# Altium PCB 3043-1-1532.PcbDoc (part 2 of 2)
Units mm, origin at the board's own origin, x right, y up, seen from the top; angles counter-clockwise.
Board outline 82.5 x 82.18 mm, 4 copper layers (Top Layer, Mid-Layer 1, Mid-Layer 2, Bottom Layer); 175 components, 111 nets, 527 pads, 268 vias.
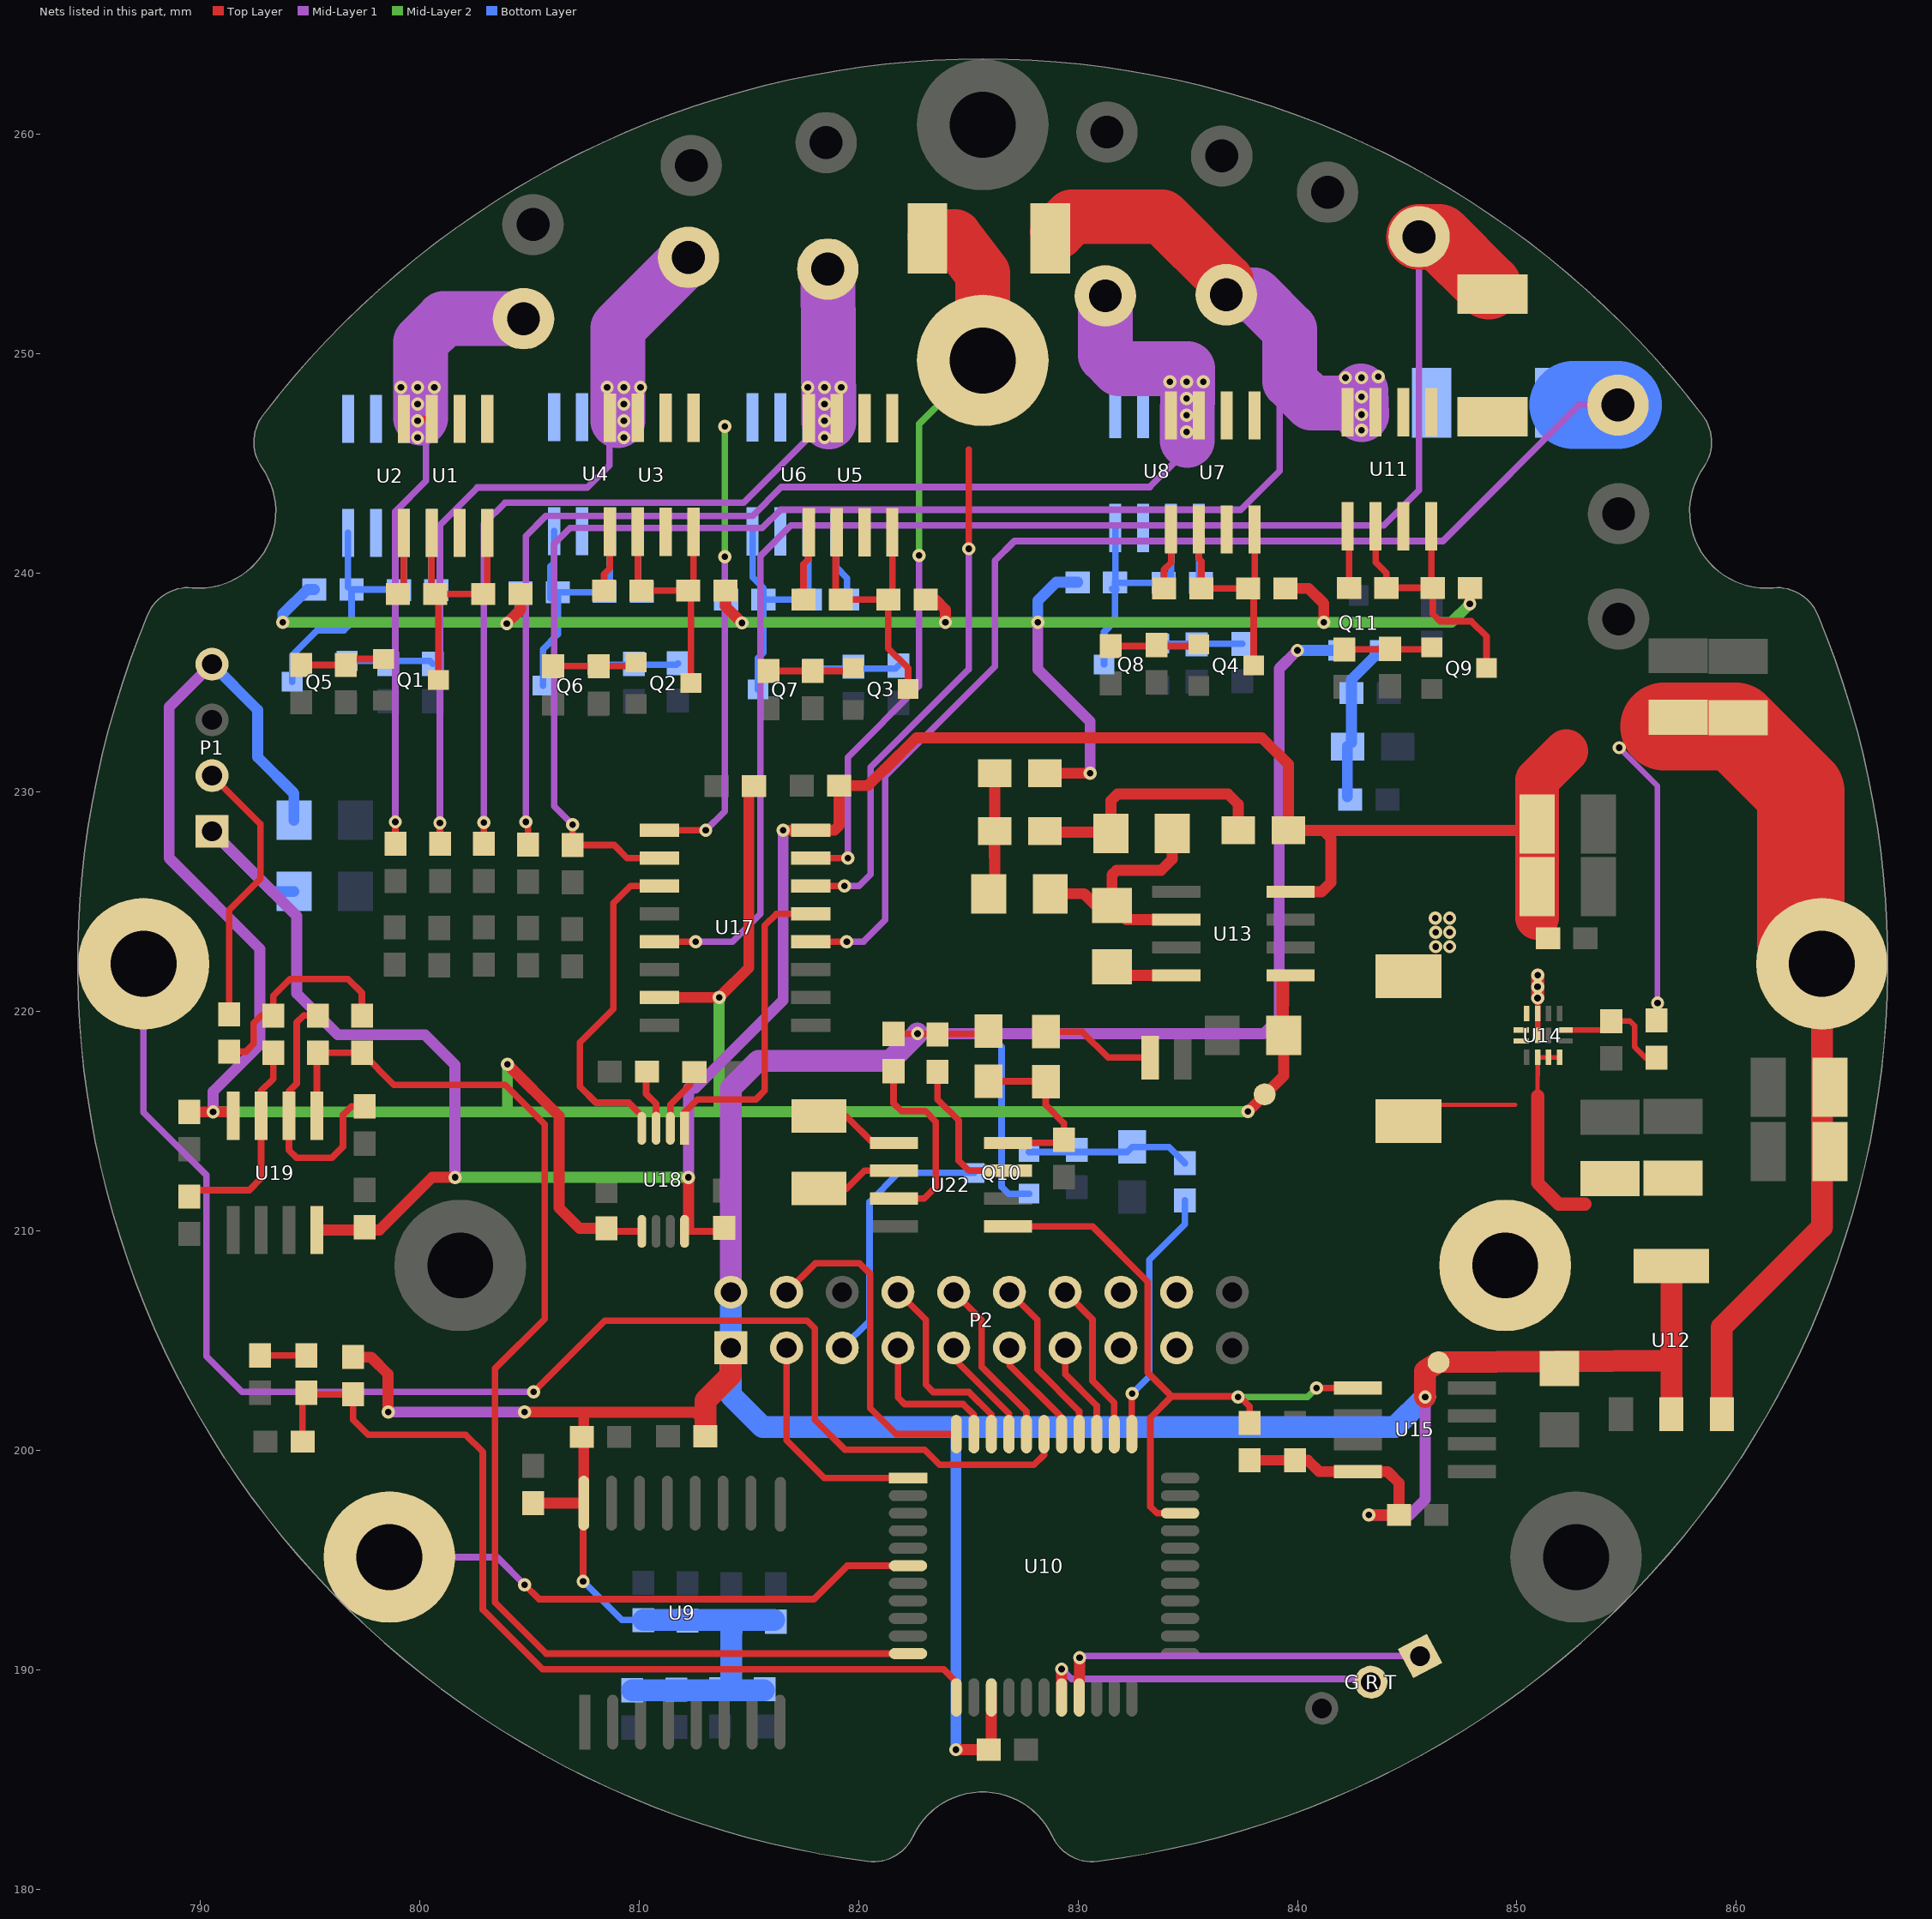
[diagram p4: the nets of this part, all layers, seen from the top]

## Via types
v1: diameter 0.6, hole 0.3, Top Layer to Bottom Layer, 268 vias

## Nets (pads, with @x,y where several pads share a name; then routed paths per layer and width w, separated by ;. In a path a pad name is that pad's centre, name@x,y a point inside that pad or via, vN(x,y) a via of type N, cw(c..) or ccw(c..) an arc to the next point about the centre after c; other vN are vias at no path point) (continued)
IIC0_SDA: R67.1 U10.31 U15.5 U22.5 | length 30.1
  Top Layer w0.3: U22.5@826.805,210.21 830.656,210.21 833.171,207.696 833.171,203.556 834.263,202.463 ; U10.31@834.649,197.139 833.593,197.139 833.298,197.434 833.298,201.498 834.263,202.463 ; R67.1@837.819,201.256 837.819,202.006 837.362,202.463 834.263,202.463 ; v1(840.867,202.844) U15.5@842.753,202.844
  Mid-Layer 2 w0.3: v1(837.286,202.438) 840.461,202.438 v1(840.867,202.844)
LED_CTRL: P2.5 Q10.3 | length 12.5
  Bottom Layer w0.3: P2.5@819.252,204.673 820.496,205.918 820.496,211.328 821.817,212.649 Q10.3@825.266,212.649
LED_PWR_EN: R47.1 U10.34 | length 11.6
  Top Layer w0.3: U10.34@832.449,200.739 v1@832.449,202.58
  Bottom Layer w0.3: v1(832.46,202.59) 833.247,203.378 833.247,208.686 834.873,210.312 R47.1@834.873,211.392
LIMA_SEN: C15.2 R46.2 U10.11 U19.1 | length 57.6
  Top Layer w0.3: U19.1@795.299,215.249 R46.2@795.299,218.073 ; R46.2@795.35,218.123 C15.2@797.357,218.123 798.818,216.662 803.885,216.662 805.688,214.859 805.688,205.994 803.427,203.733 803.427,193.065 805.754,190.739 U10.11@822.833,190.739
MCU_RXD: "G R T.2" U10.18 | length 15.6
  Top Layer w0.5: U10.18@829.249,188.739 v1(829.249,190.032)
  Mid-Layer 1 w0.3: v1(829.249,190.032) 829.696,189.586 843.198,189.586 843.349,189.435
MCU_RXD2_2: RxD.1 U10.39 | length 65.6
  Top Layer w0.3: v1(805.18,202.667) 808.431,205.918 817.651,205.918 818.007,205.562 818.007,201.397 819.379,200.025 823.011,200.025 823.697,199.339 827.989,199.339 828.449,199.799 U10.39@828.449,200.739
  Mid-Layer 1 w0.3: RxD.1@787.403,222.181 787.403,215.414 790.27,212.547 790.27,204.292 791.896,202.667 v1(805.18,202.667)
MCU_TXD: "G R T.1" U10.19 | length 17.4
  Top Layer w0.5: U10.19@830.049,188.739 v1(830.072,190.551)
  Mid-Layer 1 w0.3: v1(830.072,190.551) 830.148,190.627 845.591,190.627
MCU_TXD2_2: TxD.1 U10.6 | length 25.7
  Top Layer w0.3: v1(804.774,193.878) 805.434,193.218 817.956,193.218 819.48,194.742 820.064,194.742 U10.6@822.249,194.739 U10.6@822.833,194.739
  Mid-Layer 1 w0.3: TxD.1@798.606,195.135 803.517,195.135 v1(804.774,193.878)
NetBT2_1: BT2.1 D4.1 | length 5.3
  Top Layer w0.3: D4.1@828.528,219.089 830.185,219.089 831.367,217.907 BT2.1@833.29,217.907
NetC3_1: C3.1 U13.4 | length 3.1
  Top Layer w0.5: C3.1@831.545,222.047 831.748,222.047 832.145,221.65 U13.4@834.482,221.65
NetC3_2: C3.2 C23.2 C24.2 U13.2 | length 11.8
  Top Layer w0.5: C24.2@828.732,225.374 830.275,225.374 830.803,224.847 C3.2@831.545,224.847 ; C23.2@834.294,228.117 834.294,226.955 833.78,226.441 831.748,226.441 831.545,226.238 C3.2@831.545,224.847 ; U13.2@834.482,224.19 832.202,224.19 C3.2@831.545,224.847
NetC15_1: C15.1 R43.2 R44.1 | length 9.8
  Top Layer w0.3: R43.2@791.312,218.174 792.062,218.174 792.418,218.531 792.418,219.47 792.771,219.823 R44.1@793.318,219.823 793.318,220.726 794.08,221.488 796.722,221.488 797.357,220.853 C15.1@797.357,219.823
NetC16_1: C16.1 R44.2 U19.3 | length 9.6
  Top Layer w0.3: C16.1@789.483,211.568 789.776,211.861 792.226,211.861 792.759,212.395 792.759,216.383 793.318,216.941 R44.2@793.318,218.123
NetC23_1: C23.1 D1.2 D2.1 | length 11.8
  Top Layer w0.5: D2.1@828.553,228.182 831.43,228.182 C23.1@831.494,228.117 831.494,229.616 831.799,229.921 836.828,229.921 837.3,229.45 D1.2@837.3,228.265
NetC27_1: C27.1 D3.2 D4.2 U22.8 | length 8.3
  Top Layer w0.3: D3.2@825.912,216.828 D4.2@828.502,216.828 ; U22.8@826.805,214.02 C27.1@829.296,214.02 ; D4.2@828.528,216.803 828.528,215.742 829.361,214.909 C27.1@829.361,213.956
NetD5_2: D5.2 Q10.1 R47.2 R50.2 | length 7.5
  Bottom Layer w0.3: Q10.1@827.766,213.599 832.235,213.599 D5.2@832.465,213.829 834.136,213.829 R47.2@834.873,213.092
NetD6_2: D6.2 Q11.1 R51.1 R52.2 | length 7
  Bottom Layer w0.5: R51.1@842.278,229.793 D6.2@842.278,232.085 ; D6.2@842.455,232.262 842.455,235.141 843.747,236.433 Q11.1@843.747,236.469
NetP1_2: P1.2 R43.1 | length 12.4
  Top Layer w0.3: P1.2@790.524,230.759 792.734,228.549 792.734,226.06 791.312,224.638 R43.1@791.312,219.874
NetQ1_1: Q1.1 R70.1 R78.1 | length 3.9
  Top Layer w0.3: R70.1@794.588,235.8 R78.1@796.62,235.8 796.898,236.078 Q1.1@798.342,236.078
NetQ2_1: Q2.1 R71.1 R87.1 | length 3.6
  Top Layer w0.3: R71.1@806.069,235.749 Q2.1@809.672,235.749
NetQ3_1: Q3.1 R72.1 R88.1 | length 3.7
  Top Layer w0.3: R72.1@815.899,235.532 Q3.1@819.629,235.532
NetQ4_1: Q4.1 R73.1 R89.1 | length 3.9
  Top Layer w0.3: R73.1@831.494,236.664 Q4.1@835.428,236.664
NetQ5_1: Q5.1 R74.1 R90.1 | length 4
  Bottom Layer w0.3: Q5.1@796.676,235.989 800.444,235.989 R74.1@800.583,235.851
NetQ6_1: Q6.1 R75.1 R91.1 | length 3.7
  Bottom Layer w0.3: Q6.1@808.106,235.811 811.694,235.811 R75.1@811.759,235.876
NetQ7_1: Q7.1 R76.1 R92.1 | length 4
  Bottom Layer w0.3: Q7.1@817.911,235.633 821.676,235.633 R76.1@821.817,235.775
NetQ8_1: Q8.1 R77.1 R93.1 | length 3.8
  Bottom Layer w0.3: Q8.1@833.684,236.776 837.478,236.776 R77.1@837.489,236.765
NetQ9_1: Q9.1 R27.1 R32.1 | length 3.9
  Top Layer w0.3: R27.1@842.137,236.511 Q9.1@846.019,236.511
NetR1_1: R1.1 U1.1 U1.3 | length 2.9
  Top Layer w0.3: R1.1@798.996,239.039 799.262,239.305 U1.1@799.262,241.824
NetR2_2: R2.2 U2.1 U2.3 | length 2.6
  Bottom Layer w0.3: R2.2@800.532,239.268 U2.1@800.532,241.824
NetR6_2: R6.2 U11.1 U11.3 | length 2.7
  Top Layer w0.3: R6.2@842.354,239.319 U11.1@842.354,242.065
NetR7_2: R7.2 U3.1 U3.3 | length 2.8
  Top Layer w0.3: R7.2@808.394,239.192 808.394,239.942 808.66,240.208 U3.1@808.66,241.875
NetR10_2: R10.2 U4.1 U4.3 | length 2.8
  Bottom Layer w0.3: U4.1@809.93,241.9 809.93,239.331 R10.2@810.119,239.141
NetR11_2: R11.2 U5.1 U5.3 | length 3.2
  Top Layer w0.3: R11.2@817.487,238.785 817.487,240.399 817.728,240.64 U5.1@817.728,241.85
NetR12_2: R12.2 U6.1 U6.3 | length 3.3
  Bottom Layer w0.3: U6.1@818.972,241.891 818.972,240.259 819.467,239.764 R12.2@819.467,238.785
NetR13_2: R13.2 U7.1 U7.3 | length 2.8
  Top Layer w0.3: R13.2@833.921,239.293 833.921,240.145 834.238,240.462 U7.1@834.238,241.977
NetR14_2: R14.2 R15.1 U14.12 | length 5.6
  Top Layer w0.25: U14.12@852.195,219.163 853.897,219.163 R15.1@854.304,219.569 855.155,219.569 855.37,219.354 855.37,218.389 855.865,217.895 R14.2@856.361,217.895
NetR16_2: R16.2 U8.1 U8.3 | length 2.8
  Bottom Layer w0.3: R16.2@835.508,239.282 U8.1@835.508,242.043
NetR37_1: R37.1 R39.1 | length 2.1
  Top Layer w0.3: R39.1@792.709,204.329 R37.1@794.817,204.329
NetR41_1: R41.1 U18.2 | length 3.1
  Top Layer w0.3: U18.2@811.413,214.681 811.413,215.758 812.317,216.662 R41.1@812.317,217.361
NetR42_2: R42.2 U18.3 | length 2.8
  Top Layer w0.3: R42.2@810.311,217.336 810.311,216.256 810.763,215.803 U18.3@810.763,214.681
NetR45_2: R45.2 R46.1 U19.2 | length 12.5
  Top Layer w0.3: R46.1@795.35,219.823 794.702,219.823 794.385,219.507 794.385,216.713 794.029,216.357 794.029,213.69 794.385,213.335 795.985,213.335 796.493,213.843 796.493,215.29 796.886,215.683 R45.2@797.484,215.671
NetR48_2: R48.2 U22.7 | length 6.9
  Top Layer w0.3: R48.2@823.595,217.26 823.595,216.002 824.56,215.036 824.56,213.208 825.017,212.75 U22.7@826.805,212.75
NetR49_2: R49.2 U22.3 | length 8.8
  Top Layer w0.3: R49.2@821.588,217.285 821.588,215.824 821.944,215.468 823.036,215.468 823.519,214.986 823.519,212.014 822.985,211.48 U22.3@821.605,211.48
NetU17_3: U17.3 U18.4 | length 15.4
  Top Layer w0.3: U18.4@810.113,214.681 810.113,215.259 809.523,215.849 808.025,215.849 807.288,216.586 807.288,218.592 808.812,220.116 808.812,224.942 809.6,225.73 U17.3@810.925,225.73
NetU17_13: U17.13 U18.1 | length 14.6
  Top Layer w0.3: U18.1@812.063,214.681 812.063,215.417 812.648,216.002 815.315,216.002 815.721,216.408 815.721,223.926 816.254,224.46 U17.13@817.825,224.46
NetU22_1: U22.1 Y1.2 | length 3.9
  Top Layer w0.3: Y1.2@818.185,215.24 819.429,215.24 820.649,214.02 U22.1@821.605,214.02
NetU22_2: U22.2 Y1.1 | length 3.8
  Top Layer w0.3: Y1.1@818.185,211.938 819.455,211.938 820.268,212.75 U22.2@821.605,212.75
RHYTHM_CS0: P2.7 U10.43 | length 6.9
  Top Layer w0.3: P2.7@821.792,204.673 821.792,202.413 822.096,202.108 824.763,202.108 825.249,201.622 U10.43@825.249,200.739
RHYTHM_CS1: P2.8 U10.42 | length 9.2
  Top Layer w0.3: P2.8@821.792,207.213 823.062,205.943 823.062,202.997 823.401,202.658 825.026,202.658 826.049,201.635 U10.42@826.049,200.739
RHYTHM_CS2: P2.9 U10.41 | length 5
  Top Layer w0.3: P2.9@824.332,204.673 824.332,204.191 826.849,201.673 U10.41@826.849,200.739
RHYTHM_CS3: P2.10 U10.40 | length 7.8
  Top Layer w0.3: P2.10@824.332,207.213 825.602,205.943 825.602,203.81 827.649,201.762 U10.40@827.649,200.739
RHYTHM_CS4: P2.11 U10.38 | length 4.9
  Top Layer w0.3: P2.11@826.872,204.673 826.872,203.886 829.249,201.509 U10.38@829.249,200.739
RHYTHM_CS5: P2.12 U10.37 | length 7.8
  Top Layer w0.3: P2.12@826.872,207.213 828.142,205.943 828.142,203.698 830.049,201.791 U10.37@830.049,200.739
RHYTHM_CS6: P2.13 U10.36 | length 4.5
  Top Layer w0.3: P2.13@829.412,204.673 829.412,203.479 830.849,202.042 U10.36@830.849,200.739
RHYTHM_CS7: P2.14 U10.35 | length 7.4
  Top Layer w0.3: P2.14@829.412,207.213 830.656,205.969 830.656,203.175 831.649,202.182 U10.35@831.649,200.739
S1_1: Q1.3 R1.2 R17.1 U1.2 U1.4 | length 11.9
  Top Layer w0.3: U1.2@800.532,241.824 800.532,239.407 800.848,239.09 Q1.3@800.848,235.134 ; R1.2@800.696,239.039 R17.1@802.882,239.039 803.072,239.229 U1.4@803.072,241.824
S1_2: Q2.3 R7.1 R18.1 U3.2 U3.4 | length 11.8
  Top Layer w0.3: U3.2@809.93,241.875 809.93,239.356 R7.1@810.094,239.192 R18.1@812.229,239.192 812.47,239.432 U3.4@812.47,241.875 ; Q2.3@812.348,234.975 R18.1@812.348,239.073
S1_3: Q3.3 R11.1 R19.1 U5.2 U5.4 | length 13.2
  Top Layer w0.3: U5.2@818.947,242.113 818.947,239.026 R11.1@819.187,238.785 R19.1@821.348,238.785 ; U5.4@821.538,241.85 821.538,238.975 R19.1@821.348,238.785 ; Q3.3@822.254,234.708 822.254,235.656 821.348,236.562 R19.1@821.348,238.785
S1_4: Q4.3 R13.1 R20.1 U7.2 U7.4 | length 11.4
  Top Layer w0.3: U7.2@835.508,242.027 835.508,240.64 835.621,240.526 R13.1@835.621,239.293 R20.1@837.833,239.293 ; Q4.3@838.002,235.788 838.002,239.124 R20.1@837.833,239.293 ; U7.4@838.048,242.027 838.048,239.508 R20.1@837.833,239.293
S1_5: Q9.3 R6.1 R26.1 U11.2 U11.4 | length 13.4
  Top Layer w0.3: U11.2@843.559,242.129 843.559,240.487 844.054,239.993 R6.1@844.054,239.319 R26.1@846.164,239.319 846.164,238.137 846.506,237.795 847.928,237.795 848.619,237.104 Q9.3@848.619,235.661 ; R26.1@846.099,239.383 U11.4@846.099,242.129
S2_1: Q5.3 R2.1 R21.1 U2.2 U2.4 | length 13.3
  Bottom Layer w0.3: Q5.3@794.176,235.039 794.176,236.24 795.325,237.388 796.544,237.388 796.886,237.73 R21.1@796.886,239.243 R2.1@799.021,239.243 ; R21.1@796.722,239.356 U2.4@796.722,241.824 ; R2.1@799.047,239.217 799.262,239.432 U2.2@799.262,241.824
S2_2: Q6.3 R10.1 R22.1 U4.2 U4.4 | length 12.6
  Bottom Layer w0.3: Q6.3@805.606,234.861 805.606,236.519 806.284,237.197 R22.1@806.284,239.116 R10.1@808.394,239.116 ; R22.1@805.956,238.848 805.956,240.298 806.12,240.462 U4.4@806.12,241.9 ; R10.1@808.419,239.141 808.66,239.381 U4.2@808.66,241.9
S2_3: Q7.3 R12.1 R23.1 U6.2 U6.4 | length 12.7
  Bottom Layer w0.3: U6.4@815.162,241.891 815.162,239.801 815.657,239.307 815.657,236.359 815.411,236.113 Q7.3@815.411,234.683 ; R23.1@815.657,238.785 R12.1@817.767,238.785 ; R12.1@817.702,238.85 U6.2@817.702,241.891
S2_4: Q8.3 R16.1 R36.1 U8.2 U8.4 | length 11.9
  Bottom Layer w0.3: Q8.3@831.184,235.826 831.184,237.307 831.684,237.807 R36.1@831.684,239.573 ; R36.1@831.557,239.268 R36.1@831.582,239.243 ; R36.1@831.698,239.307 U8.4@831.698,242.043 ; R36.1@831.709,239.547 R16.1@833.896,239.547 ; R36.1@831.737,239.229 R36.1@831.737,239.268 ; R16.1@833.769,239.243 834.238,239.712 U8.2@834.238,242.043
SEN_BAT+: R4.2 U2.5 U2.6 U4.5 U4.6 U6.5 U6.6 U8.5 U8.6 U17.1 | length 20.9
  Top Layer w0.3: U17.1@810.925,228.27 v1(813.029,228.27)
  Mid-Layer 1 w0.3: v1(813.029,228.27) 813.892,229.133 v1(813.892,240.741)
  Mid-Layer 2 w0.3: v1(813.892,240.741) v1(813.892,246.685)
SEN_CHG-: R3.2 U1.5 U1.6 U3.5 U3.6 U5.5 U5.6 U7.5 U7.6 U11.5 U11.6 U17.14 | length 24.1
  Top Layer w0.3: U17.14@817.825,225.73 v1(819.353,225.73) ; v1(825.017,241.097) 825.017,245.618
  Mid-Layer 1 w0.3: v1(819.353,225.73) 820.014,225.73 820.547,226.263 820.547,231.14 825.017,235.61 v1(825.017,241.097)
SEN_MNG-: R5.2 U17.15 VMNG_IN.1 | length 33.9
  Top Layer w0.3: U17.15@817.825,227 v1(819.506,227)
  Top Layer w2.5: R5.2@823.468,255.321 824.388,255.321 825.653,253.644 VMNG_IN.1@825.653,249.681
  Mid-Layer 1 w0.3: v1(819.506,227) 819.506,231.597 822.757,234.848 v1(822.757,240.792)
  Mid-Layer 2 w0.3: v1(822.757,240.792) 822.757,246.785 VMNG_IN.1@825.653,249.681
SIM_CLK: P2.15
SIM_IO: P2.16
SIM_RST: P2.18
SIM_VCC: P2.17
SW: L2.2 U14.3 U14.14 | length 2.8
  Top Layer w0.25: U14.14@850.945,218.913 v1(850.945,220.619)
  Top Layer w0.6: v1(850.945,220.619) v1(850.951,221.666)
  other v1: 850.945,221.132 846.303,222.961 846.938,222.961 846.303,223.622 846.938,223.622 846.277,224.257 846.938,224.257
SW0: P2.3 U10.1 | length 11
  Top Layer w0.3: P2.3@816.712,204.673 816.712,200.457 818.429,198.739 U10.1@822.833,198.739
SW1: P2.4 U10.44 | length 15.1
  Top Layer w0.3: P2.4@816.712,207.213 818.032,208.534 820.039,208.534 820.522,208.051 820.522,201.93 821.712,200.739 U10.44@824.449,200.739
TEMP_SENSOR: C10.1 R33.1 R37.2 U10.12 | length 42.9
  Top Layer w0.3: C10.1@794.651,200.406 794.651,202.463 794.741,202.553 R33.1@796.95,202.553 796.95,201.397 797.636,200.711 802.081,200.711 802.869,199.923 802.869,192.735 805.586,190.017 823.874,190.017 824.449,189.443 U10.12@824.449,188.739
V_BT1: B1+.1 R24.2 U1.7 U1.8 U2.7 U2.8 | length 28.5
  Top Layer w0.3: R24.2@798.881,227.647 v1(798.881,228.651) ; v1(799.897,246.939) 799.982,247.024 U1.7@800.532,247.024
  Mid-Layer 1 w0.3: v1(798.881,228.651) 798.881,242.799 800.278,244.196 800.278,246.253
  Mid-Layer 1 w2.5: v1@800.024,247.066 800.024,250.52 801.091,251.587 B1+.1@804.723,251.587
  other v1: 799.897,246.177 799.897,247.701 799.135,248.463 799.897,248.463 800.659,248.463
V_BT2: B2+.1 R25.2 U3.7 U3.8 U4.7 U4.8 | length 33.5
  Top Layer w0.3: R25.2@800.913,227.647 v1(800.913,228.6)
  Mid-Layer 1 w0.3: v1(800.913,228.6) 800.913,242.189 802.615,243.891 807.618,243.891 808.634,244.907 808.634,246.228
  Mid-Layer 1 w2.5: v1@809.015,246.939 809.015,251.155 B2+.1@812.241,254.381
  other v1: 809.295,246.177 809.295,246.939 809.295,247.701 808.533,248.463 809.295,248.463 810.057,248.463
V_BT3: B3+.1 R30.2 U5.7 U5.8 U6.7 U6.8 | length 38.1
  Top Layer w0.3: R30.2@802.919,227.647 v1(802.919,228.625)
  Mid-Layer 1 w0.3: v1(802.919,228.625) 802.919,242.24 803.885,243.205 814.756,243.205 817.804,246.253
  Mid-Layer 1 w2.5: B3+.1@818.591,253.848 v1@818.642,246.888
  other v1: 818.439,246.177 818.439,246.939 818.439,247.701 817.677,248.463 818.439,248.463 819.201,248.463
V_BT4: B4+.1 R31.2 U7.7 U7.8 U8.7 U8.8 | length 55.3
  Top Layer w0.3: R31.2@804.926,227.621 v1@804.926,228.651
  Mid-Layer 1 w0.3: v1(804.824,228.651) 804.824,241.681 805.739,242.595 815.162,242.595 816.483,243.916 833.272,243.916 834.644,245.288
  Mid-Layer 1 w2.5: B4+.1@831.24,252.628 831.24,249.936 831.875,249.301 835,249.301 834.974,246.05
  other v1: 834.949,246.431 834.949,247.193 834.949,247.955 834.187,248.717 834.949,248.717 835.711,248.717
V_BT5: B5+.1 R5.1 R54.2 U11.7 U11.8 U17.2 | length 76.6
  Top Layer w0.3: v1(806.958,228.524) R54.2@806.958,227.596 808.851,227.596 809.447,227 U17.2@810.925,227
  Top Layer w2.5: R5.1@829.056,255.549 829.722,256.235 833.831,256.235 836.752,253.314 B5+.1@836.752,252.679
  Mid-Layer 1 w0.3: v1(806.958,228.524) 806.12,229.362 806.12,241.325 806.84,242.045 815.603,242.045 816.432,242.875 837.413,242.875 839.191,244.653 839.191,248.056
  Mid-Layer 1 w2.5: B5+.1@836.752,252.679 838.048,252.679 839.648,251.079 839.648,248.742 840.638,247.752 v1@842.899,247.752 ; v1@842.899,248.285 v1(842.924,247.218)
  other v1: 842.924,246.507 842.924,248.031 842.188,248.895 842.924,248.895 843.686,248.945
VCC_3V3: 3V3.1 C1.1 C2.1 C9.1 C18.1 D3.1 P2.1 P2.2 Q10.2 Q11.2 R8.1 R9.1 R33.2 R38.2 R48.1 R49.1 R67.2 R79.2 R80.2 R81.2 R82.2 R83.2 R84.2 R85.2 R86.2 U9.16 U10.14 U12.2 U15.8 | length 222
  Top Layer w0.3: C1.1@805.155,197.6 C1.1@805.159,197.6 ; v1(807.441,194.031) 807.441,195.91 807.45,197.596 807.45,197.6 U9.16@807.462,197.6 ; 807.466,201.447 807.644,201.625 812.521,201.625 813.015,201.131 R9.1@813.015,200.644 ; R49.1@821.588,218.985 D3.1@825.782,218.985
  Top Layer w0.5: R33.2@796.95,204.253 797.777,204.253 798.551,203.479 v1(798.551,201.752) ; v1(804.774,201.752) 812.964,201.752 ; C1.1@805.159,197.596 U9.16@807.466,197.596 807.466,201.651 807.364,201.752 ; v1(824.433,186.36) C18.1@825.92,186.36 ; C18.1@825.92,186.118 C18.1@825.92,186.36 ; U10.14@826.049,188.739 826.049,186.489 C18.1@825.92,186.36 ; R67.2@837.87,199.542 840.472,199.556 840.994,199.034 844.109,199.034 844.63,198.513 C9.1@844.63,197.053 v1(843.255,197.053)
  Top Layer w1: R9.1@813.015,201.131 813.015,202.272 814.172,203.429 P2.1@814.172,204.673 ; v1(845.82,202.438) 845.82,203.632 3V3.1@846.43,204.013 857.047,204.089 857.043,205.229 ; U12.2@857.043,201.603 U12.2@857.043,208.353
  Mid-Layer 1 w0.5: v1(798.551,201.752) v1(804.774,201.752) ; v1(822.681,218.999) 838.454,218.999 839.165,219.71 839.165,235.636 v1(839.998,236.469) ; v1(843.255,197.053) 845.109,197.053 845.82,197.764 v1(845.82,202.438)
  Mid-Layer 1 w1: P2.2@814.172,207.213 814.172,216.51 815.416,217.754 821.436,217.754 v1(822.681,218.999)
  Bottom Layer w0.3: v1(807.441,194.031) 809.205,192.266 R86.2@810.184,192.266 ; v1(822.681,218.999) 825.906,218.999 826.516,218.389 826.516,212.014 826.831,211.699 Q10.2@827.766,211.699
  Bottom Layer w0.5: v1(824.433,186.36) 824.433,201.066 ; v1(839.998,236.469) Q11.2@841.847,236.469
  Bottom Layer w1: R79.2@809.676,189.064 R82.2@815.67,189.064 ; R86.2@810.184,192.266 R83.2@816.153,192.266 ; P2.2@814.172,207.213 814.172,202.514 815.619,201.066 844.448,201.066 v1(845.82,202.438) ; 814.197,189.115 R84.2@814.197,192.19
VCC_5V: C6.1 C8.1 C11.1 C12.1 C17.1 C20.1 C22.1 C25.1 C26.1 C28.1 C29.1 D1.1 P1.1 R14.1 U12.3 U13.8 U14.4 U14.5 U14.6 U17.16 U18.8 U19.8 VCC5V.1 | length 171.8
  Top Layer w0.3: U18.8@812.063,209.986 813.705,209.986 C11.1@813.867,210.148 ; R14.1@856.412,219.671 v1(856.412,220.396)
  Top Layer w0.5: U19.8@795.299,210.049 798.16,210.049 800.557,212.446 v1(801.599,212.446) ; U18.8@812.113,210.036 812.241,210.163 v1(812.241,212.446) ; v1(816.559,228.27) 818.896,228.27 819.111,228.485 C12.1@819.111,230.302 820.42,230.302 821.157,231.038 ; 821.169,231.026 822.63,232.486 838.378,232.486 839.586,231.278 D1.1@839.586,228.265 C25.1@850.514,228.265 ; U13.8@839.682,225.46 841.105,225.46 841.527,225.882 841.527,227.907 841.169,228.265
  Top Layer w1: U12.3@859.343,201.654 859.343,205.624 863.903,210.183 VCC5V.1@863.903,222.181
  Top Layer w2: 850.925,224.282 850.922,230.553 852.249,231.879
  Top Layer w4: C22.1@856.717,232.994 859.968,232.994 862.94,230.022 862.94,223.145 VCC5V.1@863.903,222.181
  Mid-Layer 1 w0.25: v1(854.659,232.029) 856.412,230.276 v1(856.412,220.396)
  Mid-Layer 1 w0.5: P1.1@790.524,228.219 794.385,224.358 794.385,220.828 796.265,218.948 800.227,218.948 801.599,217.576 v1(801.599,212.446) ; v1(812.241,212.446) 812.241,216.51 812.546,216.51 816.559,220.523 v1(816.559,228.27)
  Mid-Layer 2 w0.5: v1(801.599,212.446) v1(812.241,212.446)
  Bottom Layer w0.5: P1.1@790.524,228.219 793.267,225.476 C17.1@794.258,225.476
VCC_9V: C24.1 D2.2 D17.1 | length 8.2
  Top Layer w0.5: C24.1@825.932,225.374 826.197,225.64 D17.1@826.197,230.866 ; D2.2@826.186,228.27 C24.1@826.2,225.642
VCC_-5V: -5V.1 C4.1 C13.1 C14.1 C19.1 C21.1 P1.4 U13.5 U17.7 U18.5 U19.4 | length 122.7
  Top Layer w0.3: C13.1@808.507,210.122 808.644,209.986 U18.5@810.113,209.986
  Top Layer w0.5: C19.1@789.483,215.429 U19.4@791.309,215.429 ; U19.4@791.489,214.579 U19.4@791.489,215.249 ; v1(803.986,217.602) 806.348,215.24 806.348,211.049 807.275,210.122 C13.1@808.507,210.122 ; U17.7@810.925,220.65 v1(813.638,220.65) 814.996,222.008 C14.1@814.996,230.263 ; v1(837.743,215.443) 839.368,217.068 C4.1@839.368,218.923 ; C4.1@839.292,219.77 U13.5@839.292,221.498 ; C4.1@839.357,218.923 U13.5@839.368,221.574
  Mid-Layer 1 w0.5: P1.4@790.524,235.839 788.568,233.883 788.568,227 792.709,222.86 792.709,218.491 790.575,216.357 v1(790.575,215.429)
  Mid-Layer 2 w0.5: v1(790.575,215.429) 803.986,215.433 813.638,215.436 ; 803.986,215.443 v1(803.986,217.602) ; v1(813.638,220.65) 813.638,215.436 ; v1(837.743,215.443) 813.638,215.436
  Bottom Layer w0.5: P1.4@790.524,235.839 792.607,233.756 792.607,231.597 794.258,229.946 C21.1@794.258,228.727
VCC_BAT: R4.1 U17.12 V.1 | length 55.6
  Top Layer w0.3: U17.12@817.825,223.19 v1(819.455,223.19)
  Mid-Layer 1 w0.3: v1(819.455,223.19) 820.217,223.19 821.207,224.18 821.207,230.734 826.211,235.737 826.211,240.563 827.1,241.452 846.633,241.452 852.83,247.65 V.1@854.608,247.65
  Bottom Layer w4: R4.1@852.576,247.65 V.1@854.608,247.65
VCC_CHARGE: R3.1 S+.1 U17.5 | length 68.4
  Top Layer w0.3: U17.5@810.925,223.19 v1(812.571,223.19)
  Top Layer w3: S+.1@845.541,255.321 846.455,255.321 R3.1@848.716,253.06
  Mid-Layer 1 w0.3: v1(812.571,223.19) 814.248,223.19 815.518,224.46 815.518,240.767 816.915,242.164 843.94,242.164 845.541,243.764 S+.1@845.541,255.321
VCC_MNG: C5.1 C7.1 L2.1 U14.8 U14.9 U14.10 VMNG_OUT.1 | length 13.6
  Top Layer w0.2: L2.1@845.642,215.748 849.93,215.748 ; 850.945,216.149 850.951,217.913 U14.8@850.951,217.932 ; U14.8@850.945,217.913 U14.10@851.945,217.913
  Top Layer w0.6: 850.945,216.149 850.945,212.197 851.916,211.226 853.11,211.226
VCC_TH: D17.2 R17.2 R18.2 R19.2 R20.2 R21.2 R22.2 R23.2 R26.2 R36.2 | length 81.5
  Top Layer w0.5: v1(803.961,237.693) 804.582,238.315 R17.2@804.582,239.039 ; R18.2@813.929,239.192 813.929,238.469 v1(814.68,237.719) ; R19.2@823.048,238.785 823.493,238.785 823.951,238.328 v1(823.951,237.744) ; D17.2@828.483,230.866 v1(830.549,230.866) ; R20.2@839.456,239.293 840.511,239.293 841.197,238.608 v1(841.197,237.744) ; v1@847.864,238.594 R26.2@847.864,239.319
  Mid-Layer 1 w0.5: v1(828.167,237.744) 828.167,235.61 830.549,233.228 v1(830.549,230.866)
  Mid-Layer 2 w0.5: v1(793.75,237.744) 847.014,237.744 v1(847.852,238.582)
  Bottom Layer w0.5: v1(793.75,237.744) 793.75,238.125 794.868,239.243 R21.2@795.186,239.243 ; v1(803.961,237.693) 804.584,238.316 R22.2@804.584,239.116 ; R23.2@813.957,238.785 813.957,238.442 v1(814.68,237.719) ; v1(828.167,237.744) 828.167,238.735 829.005,239.573 R36.2@829.984,239.573
pads on no net: U9.13 U10.13 U10.15 U10.17 U10.20 U10.21 U10.22 U10.23 U10.24 U10.25 U10.26 U10.27 U10.28 U10.29 U13.7 U14.7 U17.4 U17.11 U19.5 U19.6 U19.7

## Polygon pours and split planes (outlines as drawn)
GND on Top Layer (solid, remove dead copper): 782.726,264.338 867.994,264.338 867.994,179.883 783.057,179.883 783.057,264.033
VCC_5V on Top Layer (solid, remove dead copper): 859.257,234.899 850.9,234.899 848.335,232.334 848.411,232.334 848.411,232.308 848.106,232.308 848.106,218.567 850.544,218.567 850.544,219.913 850.087,219.913 850.087,222.809 851.916,222.809 851.916,230.759 859.257,230.759
GND on Top Layer (solid, remove dead copper): 858.342,213.792 859.993,215.443 859.993,228.168 857.123,228.168 855.447,229.845 852.907,229.845 852.907,224.104 852.475,223.672 852.475,222.301 851.598,222.301 851.598,220.472 851.445,220.32 851.445,219.685 853.415,219.685 853.415,220.904 857.783,220.904 857.783,216.611 854.786,216.611 854.786,218.44 852.907,218.44 852.907,213.893 858.444,213.893
SW on Top Layer (solid, remove dead copper): 842.442,220.421 847.598,220.421 847.598,225.374 842.442,225.374
VCC_MNG on Top Layer (solid, remove dead copper): 858.418,213.182 852.322,213.182 852.322,218.186 850.951,218.186 850.951,217.119 842.467,217.119 842.467,211.125 843.661,209.931 856.437,209.931 856.894,210.388 858.469,210.388 858.469,213.182
V_BT1 on Top Layer (solid, remove dead copper): 798.964,245.948 800.913,245.948 800.913,248.971 798.855,248.971 798.855,245.948
V_BT2 on Top Layer (solid, remove dead copper): 808.362,245.948 810.311,245.948 810.311,248.971 808.253,248.971 808.253,245.948
V_BT3 on Top Layer (solid, remove dead copper): 817.506,245.948 819.455,245.948 819.455,248.971 817.397,248.971 817.397,245.948
V_BT4 on Top Layer (solid, remove dead copper): 834.016,246.202 835.965,246.202 835.965,249.225 833.907,249.225 833.907,246.202
NetR1_1 on Top Layer (solid, remove dead copper): 798.928,240.843 802.437,240.843 802.437,245.415 798.119,245.415 798.119,240.843
NetR7_2 on Top Layer (solid, remove dead copper): 808.12,240.843 811.835,240.843 811.835,245.415 807.263,245.415 807.263,240.843
NetR11_2 on Top Layer (solid, remove dead copper): 817.264,240.843 820.979,240.843 820.979,245.415 816.407,245.415 816.407,240.843
NetR13_2 on Top Layer (solid, remove dead copper): 833.774,241.097 837.489,241.097 837.489,245.669 832.917,245.669 832.917,241.097
V_BT5 on Top Layer (solid, remove dead copper): 842.042,246.253 843.991,246.253 843.991,249.276 841.934,249.276 841.934,246.253
NetR6_2 on Top Layer (solid, remove dead copper): 841.623,240.944 845.337,240.944 845.337,245.516 840.765,245.516 840.765,240.944
SEN_CHG- on Top Layer (solid, remove dead copper): 801.522,245.974 821.639,245.974 822.909,244.704 831.85,244.704 831.85,246.253 846.48,246.253 846.48,246.507 850.519,246.507 850.519,249.428 846.48,249.428 846.48,252.298 846.455,252.298 846.455,252.349 846.125,252.349 846.125,252.298 801.522,252.298
GND on Mid-Layer 2 (solid, remove dead copper): 782.777,264.541 868.172,264.541 868.172,179.781 782.93,179.781 782.93,264.541
GND on Bottom Layer (solid, remove dead copper): 782.879,264.668 869.112,264.668 869.112,179.553 781.914,179.553 781.914,264.668
SW on Bottom Layer (solid, remove dead copper): 845.947,222.555 847.319,222.555 849.478,220.396 851.205,220.396 851.205,221.971 849.833,221.971 847.166,224.638 845.947,224.638
V_BT1 on Bottom Layer (solid, remove dead copper): 798.964,245.948 800.913,245.948 800.913,248.971 798.855,248.971 798.855,245.948
V_BT2 on Bottom Layer (solid, remove dead copper): 808.362,245.948 810.311,245.948 810.311,248.971 808.253,248.971 808.253,245.948
V_BT3 on Bottom Layer (solid, remove dead copper): 817.506,245.948 819.455,245.948 819.455,248.971 817.397,248.971 817.397,245.948
V_BT4 on Bottom Layer (solid, remove dead copper): 834.016,246.202 835.965,246.202 835.965,249.225 833.907,249.225 833.907,246.202
NetR2_2 on Bottom Layer (solid, remove dead copper): 798.42,240.589 801.929,240.589 801.929,245.161 797.611,245.161 797.611,240.589
NetR10_2 on Bottom Layer (solid, remove dead copper): 807.818,240.843 811.327,240.843 811.327,245.415 807.009,245.415 807.009,240.843
NetR12_2 on Bottom Layer (solid, remove dead copper): 816.708,240.843 820.217,240.843 820.217,245.415 815.899,245.415 815.899,240.843
NetR16_2 on Bottom Layer (solid, remove dead copper): 833.218,240.843 836.727,240.843 836.727,245.415 832.409,245.415 832.409,240.843
SEN_BAT+ on Bottom Layer (solid, remove dead copper): 794.893,245.974 821.004,245.974 821.004,242.951 830.885,242.951 830.885,246.151 848.36,246.151 848.36,252.755 794.817,252.755 794.817,245.923

## Keep-outs
Keep-Out Layer:
  the board outline again, w0.127

## Silkscreen, mask and mechanical layers (free items; w line width, h text height)
Bottom Overlay:
  rectangle: 814.807,221.386 830.986,224.8
  text "PN:3043-1-1532" at 834.441,227.635 h1
  text "Rev:2.10" at 834.39,225.781 h1
  text "SN:" at 834.085,222.758 h1
Mechanical 1:
  circle w0.127: c801.837,208.432 r1.5
  circle w0.127: c837.028,204.679 r0.5
  circle w0.127: c834.488,204.679 r0.5
  circle w0.127: c816.708,204.679 r0.5
  circle w0.127: c819.248,204.679 r0.5
  circle w0.127: c821.788,204.679 r0.5
  circle w0.127: c824.328,204.679 r0.5
  circle w0.127: c826.868,204.679 r0.5
  circle w0.127: c829.408,204.679 r0.5
  circle w0.127: c831.948,204.679 r0.5
  circle w0.127: c831.948,207.219 r0.5
  circle w0.127: c829.408,207.219 r0.5
  circle w0.127: c826.868,207.219 r0.5
  circle w0.127: c824.328,207.219 r0.5
  circle w0.127: c821.788,207.219 r0.5
  circle w0.127: c819.248,207.219 r0.5
  circle w0.127: c816.708,207.219 r0.5
  circle w0.127: c814.168,204.679 r0.5
  circle w0.127: c814.168,207.219 r0.5
  circle w0.127: c834.488,207.219 r0.5
  circle w0.127: c837.028,207.219 r0.5
  circle w0.127: c849.469,208.431 r1.5
  circle w0.127: c825.653,249.681 r1.5
  circle w0.127: c787.403,222.181 r3
  circle w0.127: c863.903,222.181 r3
  circle w0.127: c852.7,195.135 r3
  circle w0.127: c798.606,195.135 r3
  circle w0.127: c825.653,260.431 r3
  circle w0.127: c825.653,249.681 r3
  circle w0.127: c801.837,208.431 r3
  circle w0.127: c849.469,208.432 r3
  lines w0.127: 812.898,203.409 812.898,208.439 838.298,208.439 838.298,203.409 812.898,203.409

## Text inside footprints (layer, text, board x,y; h text height)
P2: Top Overlay "2" at 811.632,206.705 h1.27; Top Overlay "1" at 811.632,204.165 h1.27; Top Overlay "19" at 838.556,204.165 h1.27; Top Overlay "20" at 838.556,206.705 h1.27